# Altium PCB PCB1.PcbDoc
Units mil, origin at the board's own origin, x right, y up, seen from the top; angles counter-clockwise.
Board outline 1630 x 2680 mil, 2 copper layers (Top Layer, Bottom Layer); 18 components, 10 nets, 48 pads, 2 vias.
Unrouted connection lines stored in the file: 4.
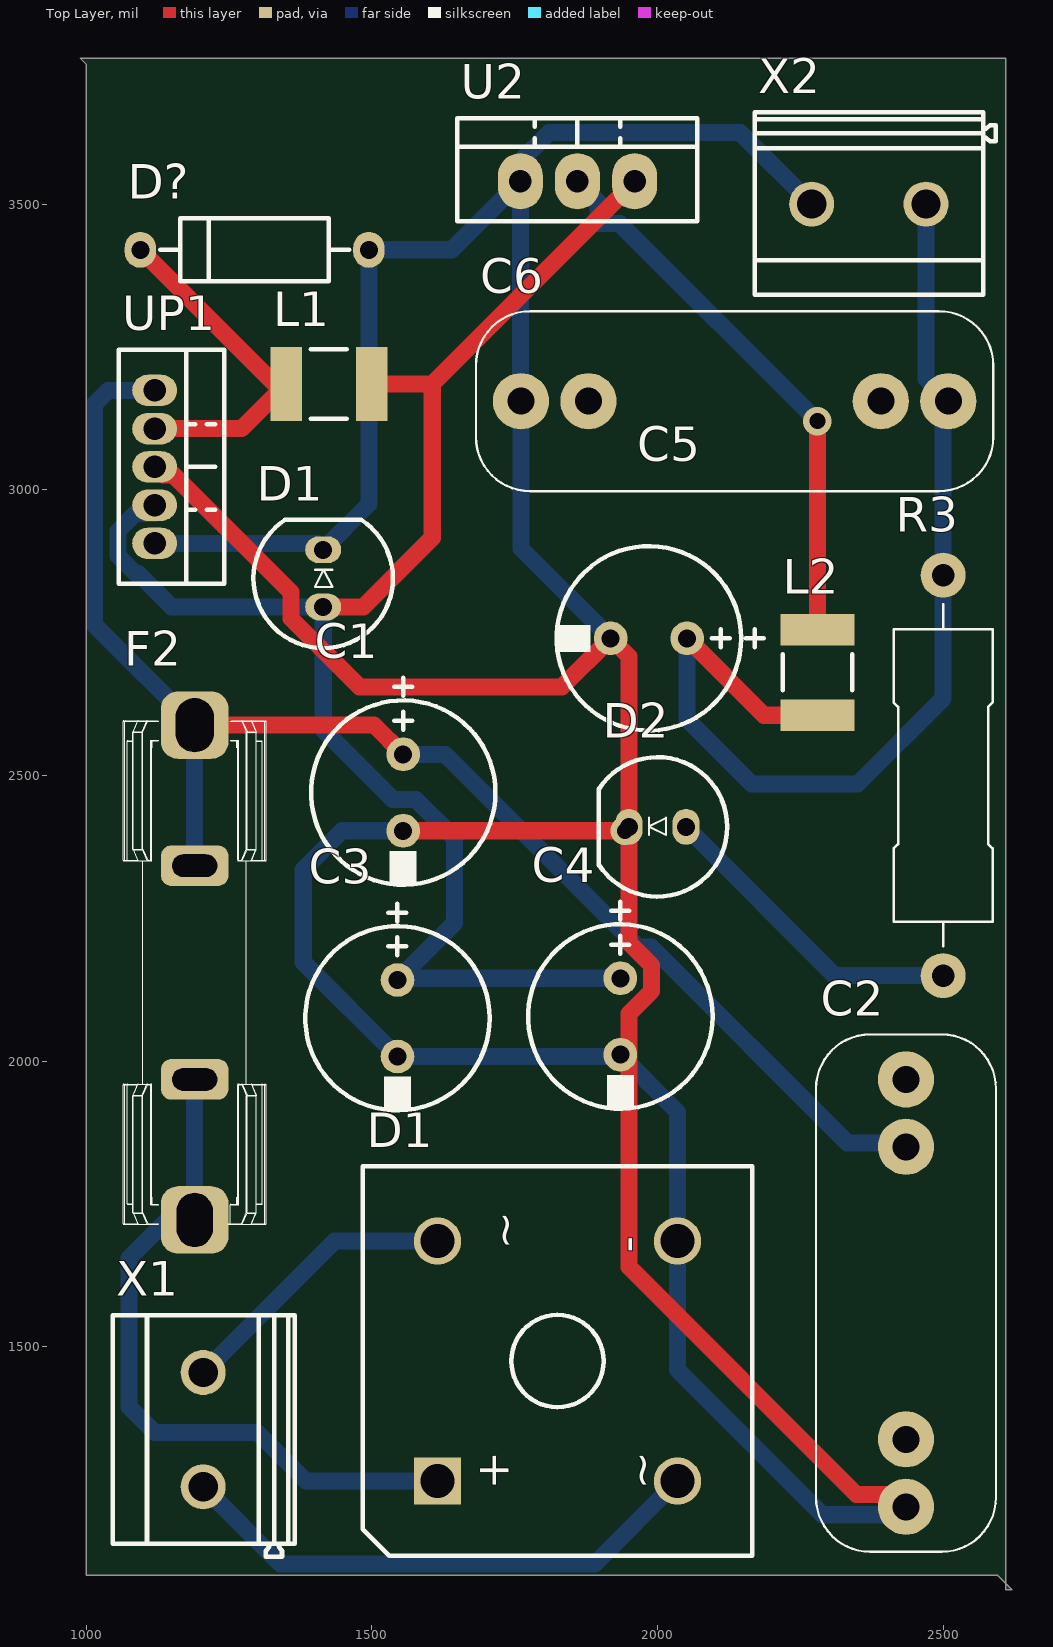
[diagram p0: Top Layer view]
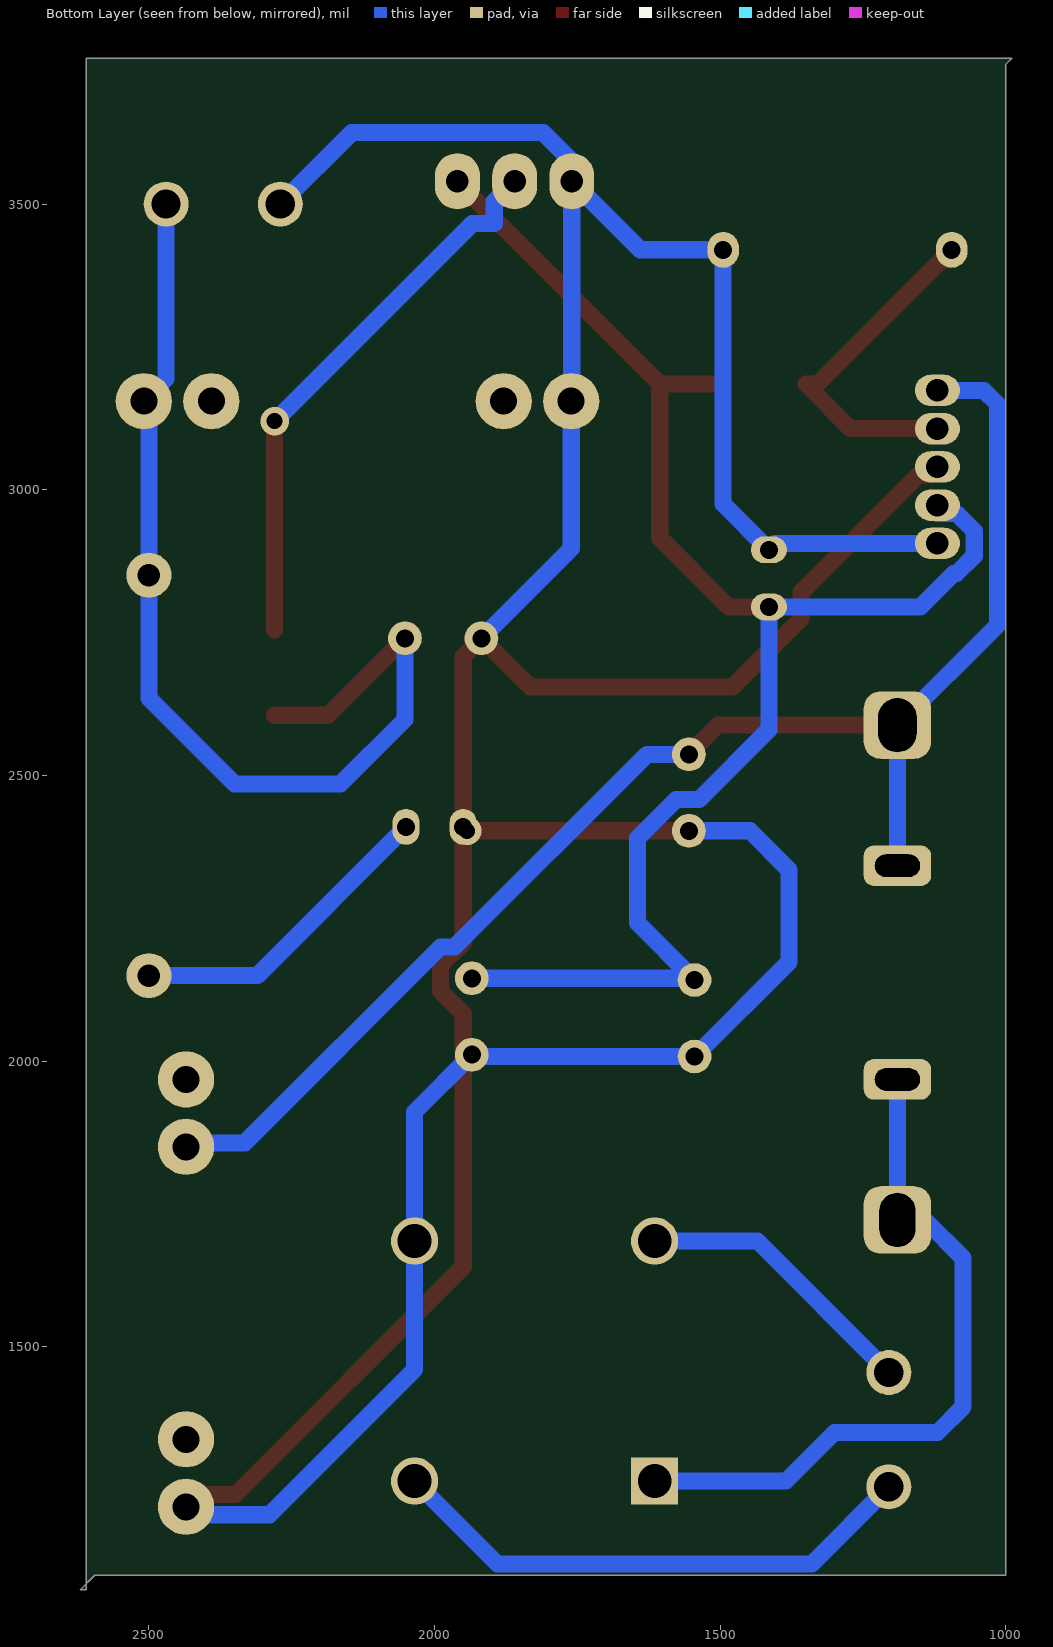
[diagram p1: Bottom Layer view, seen from below]
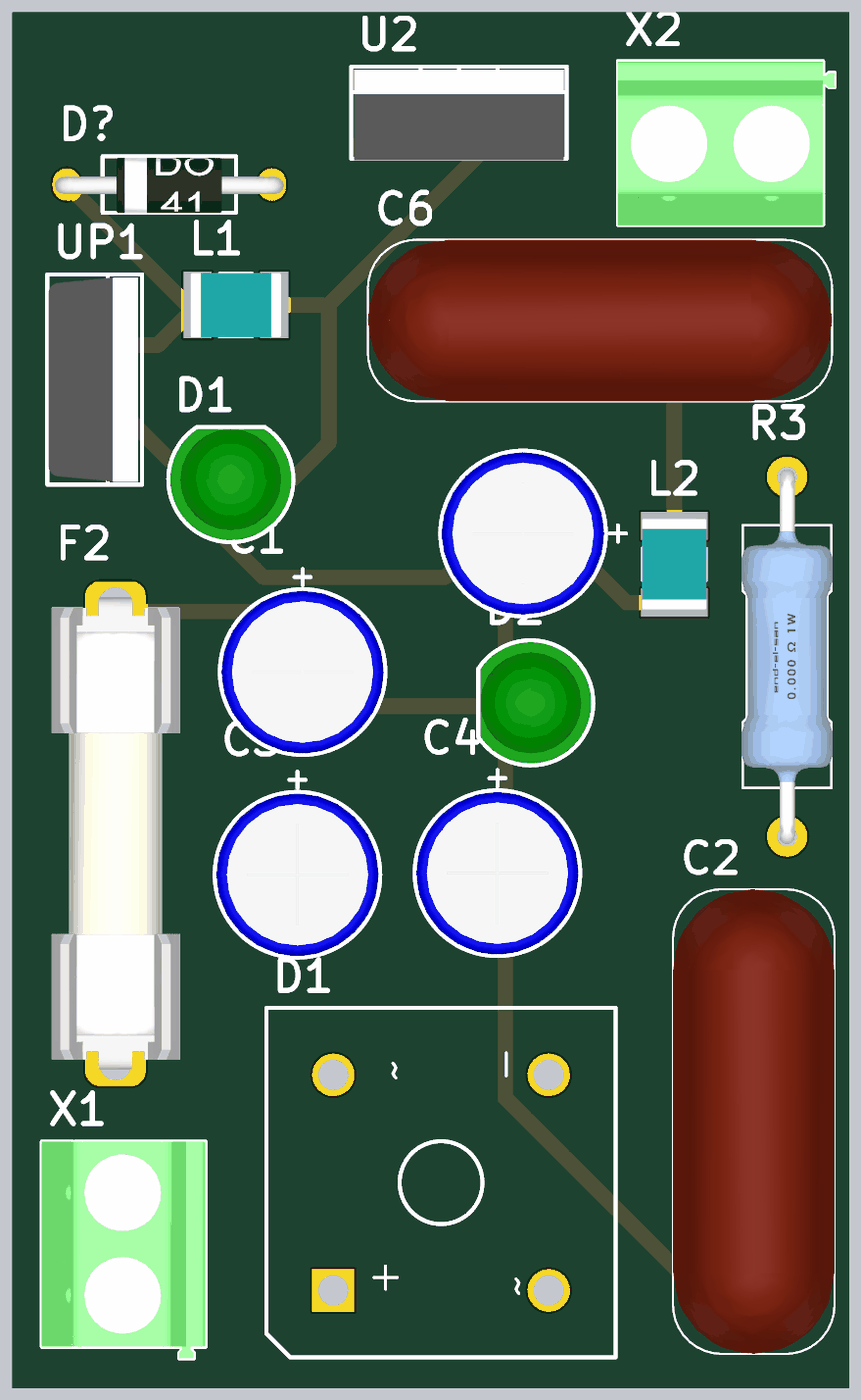
[diagram p2: 3D render of the assembled board from above, using the file's embedded part models]

## Layer stack, top to bottom
Top Solder: solder mask 0.4, Solder Resist, Dk 3.5
Top Layer: signal copper 1.4
Dielectric 1: dielectric 12.6, FR-4, Dk 4.8
Bottom Layer: signal copper 1.4
Bottom Solder: solder mask 0.4, Solder Resist, Dk 3.5

## Board outline
2620,1075 2595,1100 1000,1100 1000,3745 990,3755 2610,3755 2610,1075

## Design rules (kind name [scope] priority, off if disabled: settings)
Clearance [All] p1: gap=10 ignorepadtopadclearanceinfootprint=FALSE except(0: Arc-Hole Track-Hole SMDPad-Hole THPad-Hole Via-Hole Fill-Hole Poly-Hole Region-Hole Text-Hole)
PolygonConnect [All] p1: connectstyle=Relief reliefconductorwidth=10 reliefentries=4 polygonreliefangle="90 Angle" airgapwidth=10
RoomDefinition Sheet1 [InComponentClass('Sheet1')] p1: confinementstyle=ConfineOut formatcopy=TRUE lockcomponents=FALSE outline 7045,1060 13220,1060 13220,2190 7045,2190
RoutingVias [All] p1: holewidth=28 width=50 viastyle="Through Hole" minholewidth=28 minwidth=50 maxholewidth=28 maxwidth=50
SolderMaskExpansion [All] p1: expansion=4
Width [All] p1: maxlimit=40 minlimit=20 preferedwidth=30
30 further rules are at their usual default settings.

## Classes and differential pairs
component class Sheet1: C1 C2 C3 C4 C5 C6 D1 D2 D? F2 L1 L2 R3 U2 UP1 X1 X2

## Components (designator, comment, footprint, x,y, rotation, side; value= is the part's Value field where it differs from the comment)
C1 "330uF" C_EL_8X12 1555,2470 r270 top
C2 "" CBB22 2435,1594.02 r90 top
C3 "330uF" C_EL_8X12 1545,2075 r270 top
C4 "330uF" C_EL_8X12 1935.01,2078.07 r270 top
C5 "330uF" C_EL_8X12 1985,2740 r180 top
C6 "" CBB22 2135,3155 r0 top
D1 "Bridge2" D-46_6A 1825,1475 r90 top
D1 "LED5MM" LED5MM_BLUE 1415,2845 r90 top
D2 "LED5MM" LED5MM_BLUE 2000,2410 r180 top
D? "ZENER15V" D_AX04_DO41 1295,3420 r180 top
F2 "F=1.0 A" "Fuse 5x20 With holder pin" 1190,2155 r180 top
L1 "Inductor" INDC4532 1425,3185 r0 top value=10mH
L2 "Inductor" INDC4532 2280,2680.2 r270 top value=10mH
R3 "1K" "Axial 1W  7_0mm" 2500,2500 r90 top
U2 "LM1086T-ADJ" TO220_3 1860,3540 r0 top
UP1 "LM2576HVT-ADJ" TO220_5 1120,3040 r270 top
X1 "CON_Phoenix_MKDSN_02" CON_MKDSN1,5/2-5,08 1205,1355 r90 top
X2 "CON_Phoenix_MKDSN_02" CON_MKDSN1,5/2-5,08 2370,3500 r180 top

## Footprints (in the part's own frame and the unit in brackets; to place one, negate y for a bottom-side part, rotate by r counter-clockwise, add the part's x,y. Pads: shape width x height; smd on the part's side, far side on the other; paste and mask are expansions set on the pad)
"Axial 1W  7_0mm" [mm] "Designer Abbas Basereh"
  round 2 hole 1: 1(8.9,0) 2(-8.9,0)
  silkscreen extent -7.6,-2.2 7.6,2.2, body extent -9.26,-2.25 9.27,2.25, height 5.22
C_EL_8X12 [mm] "Cap Elec, D8.0X12.0H pitch: 3.5mm, RB.14/.26, RB.15/.32"
  round 1.5 hole 0.8: 1(-1.7,0) 2(1.7,0)
  silkscreen extent -5.1,-4.1 4.1,4.1, body extent -4.02,-4.03 4.03,4.03, height 2.98
CBB22 [mm] "W23_0_H14_5_T8_0_P19"
  round 2.5 hole 1.2: 1(-9.5,0) 1(-6.5,0) 2(6.5,0) 2(9.5,0)
  silkscreen extent -11.5,-4 11.5,4, body extent -11.5,-4 11.5,4, height 19.5
CON_MKDSN1,5/2-5,08 [mm]
  round 2 hole 1.3: 1(-2.54,0) 2(2.54,0)
  silkscreen extent -5.65,-4.07 5.08,4.03, body extent -5.64,-4.05 5.09,4.05, height 10.03
D-46_6A [mm] "Bridge Rectifier; 4 Terminals; Body 16.8 x 16.8 mm (typ); Pitch 10.67 mm"
  rect 2.1x2.1 hole 1.5: 1(-5.335,5.335)
  round 2.1 hole 1.5: 2(-5.335,-5.335) 3(5.335,-5.335) 4(5.335,5.335)
  silkscreen extent -8.65,-8.65 8.65,8.65, body extent -8.65,-8.65 8.65,8.65, height 6.35
D_AX04_DO41 [mm] "DIODE 0.4 INCH SPACING DO-41"
  oval 1.4x1.6 hole 0.8: 1(-5.08,0) 2(5.08,0)
  silkscreen extent -4.2,-1.4 4.2,1.4, body extent -5.68,-1.32 5.68,1.4, height 2.85
"Fuse 5x20 With holder pin" [mm] "Dsigner : Abbas Basereh"
  rrect50% 3x3 hole 1.6 slot 2.4 at 90 deg: 1(0,11)
  rrect50% 3x1.8 hole 1 slot 2 at 0 deg: 1(0,4.75) 2(0,-4.75)
  rrect50% 3x3 hole 1.7 slot 2.4 at 90 deg: 2(0,-11)
  silkscreen extent -3.18,-11.19 3.18,11.19, body extent -3.17,-11.69 3.17,11.69, height 8.63
INDC4532 [mm] "Chip Inductor, Body 4.5x3.2mm, IPC High Density"
  rect 1.4x3.3 smd: 1(-1.9,0) 2(1.9,0)
  silkscreen extent -0.8,-1.55 0.8,1.55, body extent -2.25,-1.6 2.25,1.6, height 1.75
LED5MM_BLUE [mm] "LED 5MM THROUGH HOLE BLUE-Designer Abbas Basereh"
  oval 1.2x1.6 hole 0.8: 1(-1.27,0) 2(1.27,0)
  silkscreen extent -3.1,-3.1 2.6,3.1, body extent -3,-3 2.5,3, height 9.14
TO220_3 [mm] "TO-220 3 LEAD, TO-262, pitch: 2.54mm  10x4.5mm"
  oval 2x2.5 hole 1: 1(-2.54,0) 2(0,0) 3(2.54,0)
  silkscreen extent -5.33,-1.78 5.33,2.79, body extent -5.2,-1.85 5.2,2.65, height 19
TO220_5 [mm] "TO-220 STRAIGHT, T05A pitch: 1.7mm"
  oval 1.4x2 hole 1: 1(-3.4,0) 2(-1.7,0) 3(0,0) 4(1.7,0) 5(3.4,0)
  silkscreen extent -5.2,-1.6 5.2,3.1, body extent -5.06,-1.55 5.06,2.91, height 17.05

## Part data
C1 C3 C4 C5: library part CAP_THD_EL_330u25V, "CAP, THD, ELEC, 330uF, 25V", =http://www.chila.ir, ASSEMBLY=ASSEMBLY, DESC=DESCRIPTION, DIST#=MOUSER, MANF=PANASONIC, MANF_P#=EEE-1EA331UP, PARAM=25V, PARAM2=20%, PRICE="10= 5$"
C2 C6: library part "Cap CBB22 105J400V", "Polypropylene film with epoxy Cap CBB22 105J400V", Manufacturer=CHINA, Data=16-12-2016, Designer="Abbas Basereh", Link=https://www.alibaba.com/product-detail/CBB22-capacitors-105J-400V-1UF-400V_60020643516.html, Part. No=105J400V
D1: "Diode Bridge", LatestRevisionDate=17-Jul-2002, LatestRevisionNote="Re-released for DXP Platform.", PackageDescription="Bridge Rectifier; 4 Terminals; Body 16.8 x 16.8 mm (typ); Pitch 10.67 mm", PackageReference=D-46_6A, Published=24-Mar-1999, Publisher="Altium Limited"
D1 D2: "LED LIGHTING", Data=16-12-2016, Designer="Abbas Basereh"
D?: library part DIODE_THD_ZENER, "DIODE, ZENER, 0.2W, 15V", =http://www.chila.ir, ASSEMBLY=ASSEMBLY, DESC=DESCRIPTION, MANF=Diodes, MANF_P#=ZENER15V, PARAM=15V, PARAM2=0.2W, PRICE=PRICE
F2: library part "Fuse 5x20 with holdeer pins", "Fuses 5x20", Data=28-12-2016, Desc.="fuse with holder pins 5x20", Designer="Abbas Basereh"
R3: library part "RES Axial 1W", "RES Axial 1W", Data=4-1-2017, Desc.="RES Axial 1W", Designer="Abbas Basereh"
U2: library part VREG_1086_TO220, "REG, Linear, LDO1.3, Adj, 1.5A, TO-220", =http://www.chila.ir, MANF="TI, ST", MANF_P#="LM1086IT-ADJ, LD1086VY, LD1086V-DG, LM1086CT-ADJ", PARAM=1.5A, PARAM2="2.8~30VIN, 1.3VDROP, 1.25VREF"
UP1: library part VREG_LM2576HVT-ADJ, "REG, Switching, Buck, 3A, ADJ, 50KHz, HV, TO-220", =http://www.chila.ir, ASSEMBLY=ASSEMBLY, DESC="REG, Switching, Buck, 3A, ADJ, 50KHz, HV, TO-220", MANF="TI, ON, HTC, MICROCHIP", MANF_P#=LM2576HVT-ADJ, PARAM="3A, ADJ", PARAM2="50KHz, 60VIN", PRICE=PRICE
X1 X2: Manufacturer="PHOENIX CONTACT", Max Current="13.5 A", Voltage="400 V", Category=Connector, Company="SJ Libraries", ComponentLink1Description=Datasheet, ComponentLink2Description=Reference, Connector type="PCB Terminal Block", Designer="Eng. Saeid Jorablo", HelpURL=http://s3.picofile.com/file/7443264187/Coming_Soon_logo.gif, Mounting Technology=Through-Hole, Pin Count=2, Positions=2, Publisher="SJ UnLimited", Revision 1="2012/10/1 : Adding Model", Status=Unreleased, Update=2012/10/1
L1 L2: Code_IEC=1005, Code_JEITA=0402, LatestRevisionDate=29-May-2009, LatestRevisionNote="IPC-7351 Footprint Added.", PackageDescription="Chip Inductor", PackageReference=0402-A, Published=8-Jun-2000, Publisher="Altium Limited"

## Via types
v1: diameter 50, hole 28, Top Layer to Bottom Layer, 2 vias

## Nets (pads, with @x,y where several pads share a name; then routed paths per layer and width w, separated by ;. In a path a pad name is that pad's centre, name@x,y a point inside that pad or via, vN(x,y) a via of type N, cw(c..) or ccw(c..) an arc to the next point about the centre after c; other vN are vias at no path point)
3.5: C5.1 C6.2 L2.2 R3.1 X2.1 | length 1867.7
  Top Layer w30: C5.1 2186.54,2605.39 L2.2
  Bottom Layer w30: C5.1 2051.93,2598.07 2165,2485 2350,2485 2500,2635 R3.1 2500,3145.98 2509.02,3155 2470,3194.02 X2.1
24v: C1.1 C2.2 F2.2 UP1.1 | length 2503.2
  Top Layer w30: F2.2@1190,2588.07 1503.85,2588.07 C1.1
  Bottom Layer w30: UP1.1 1038.86,3173.86 1015,3150 1015,2763.07 1190,2588.07 F2.2@1190,2342.01 ; C1.1 1628.07,2536.93 1965.47,2199.53 1989.53,2199.53 2332.17,1856.89 C2.2@2395,1856.89
GND: C1.2 C2.1 C3.2 C4.2 C5.2 C6.1 D1.2@1415,2895 D1.3 D2.2 D?.1 U2.1 UP1.3 UP1.5 X2.2 | length 7912
  Top Layer w30: UP1.3 1134.37,3025.63 1153.58,3025.63 1358.5,2820.71 1358.5,2774.86 1478.36,2655 1833.06,2655 C5.2 1950,2708.08 D2.2 1950,2207.11 1989.53,2167.59 1989.53,2122.41 1950,2082.89 1950,1640 2348.52,1241.48 C2.1@2430.49,1241.48 ; C1.2 v1(1943.07,2403.07)
  Bottom Layer w30: UP1.5 1403.86,2906.14 1415,2895 1495,2975 D?.1 1640,3420 U2.1 ; C1.2 1448.07,2403.07 1380,2335 1380,2173.06 C3.2 1931.93,2008.07 C4.2 2035.04,1911.1 D1.3 2035.04,1459.96 2289.02,1205.98 C2.1@2395,1205.98 ; C5.2 1760.98,2897.09 1760.98,3155 1760,3155.98 U2.1 ; v1(1943.07,2403.07) D2.2 ; X2.2 2145,3625 1810,3625 1760,3575 U2.1
NetC3_1: C3.1 C4.1 D1.1@1415,2795 L1.2 U2.3 UP1.4 | length 2849.5
  Top Layer w30: D1.1@1415,2795 1485,2795 1605.88,2915.88 1605.88,3185 ; L1.2 1605.88,3185 ; U2.3 1960,3539.12 1605.88,3185
  Bottom Layer w30: UP1.4 1120,2958.7 1086.42,2958.7 1055.63,2927.91 1055.63,2884.37 1086.42,2853.58 1091.42,2853.58 1150,2795 1415,2795 1415,2580 1537.4,2457.6 1577.58,2457.6 1645,2390.18 1645,2241.94 C3.1@1548.06,2145 ; C3.1 C3.1@1548.06,2145 ; C4.1 C3.1@1548.06,2145
NetD1_1: D1.1@1614.96,1264.96 F2.1 | length 1242.6
  Bottom Layer w30: F2.1@1190,1967.99 1190,1721.93 1141.93,1721.93 1075,1655 1075,1395 1120,1350 1300,1350 1385.04,1264.96 D1.1@1614.96,1264.96
NetD1_2: D1.2@2035.04,1264.96 X1.1 | length 946
  Bottom Layer w30: X1.1 1340,1120 1890.08,1120 D1.2@2035.04,1264.96
NetD1_4: D1.4 X1.2 | length 505.2
  Bottom Layer w30: X1.2 1435.04,1685.04 D1.4
NetD2_1: D2.1 R3.2 | length 557.9
  Bottom Layer w30: D2.1 2310.39,2149.61 R3.2
NetD?_2: D?.2 L1.1 UP1.2 | length 615.1
  Top Layer w30: D?.2 1330,3185 L1.1 1272.13,3106.93 UP1.2
NetL2_1: L2.1 U2.2 | length 981.6
  Top Layer w30: L2.1 v1(2280,3120)
  Bottom Layer w30: U2.2 1895.63,3504.37 1895.63,3465.79 1934.21,3465.79 v1(2280,3120)

## Text inside footprints (layer, text, board x,y; h text height)
D1: Top Overlay "+" at 1739.68,1249.69 h59.06 r90; Top Overlay "-" at 1974.96,1664.96 h59.06 r90; Top Overlay "~" at 1759.68,1669.69 h59.06 r90; Top Overlay "~" at 1999.68,1249.69 h59.06 r90